# EAGLE board L1-Mainv1 (EAGLE 7.2.0)
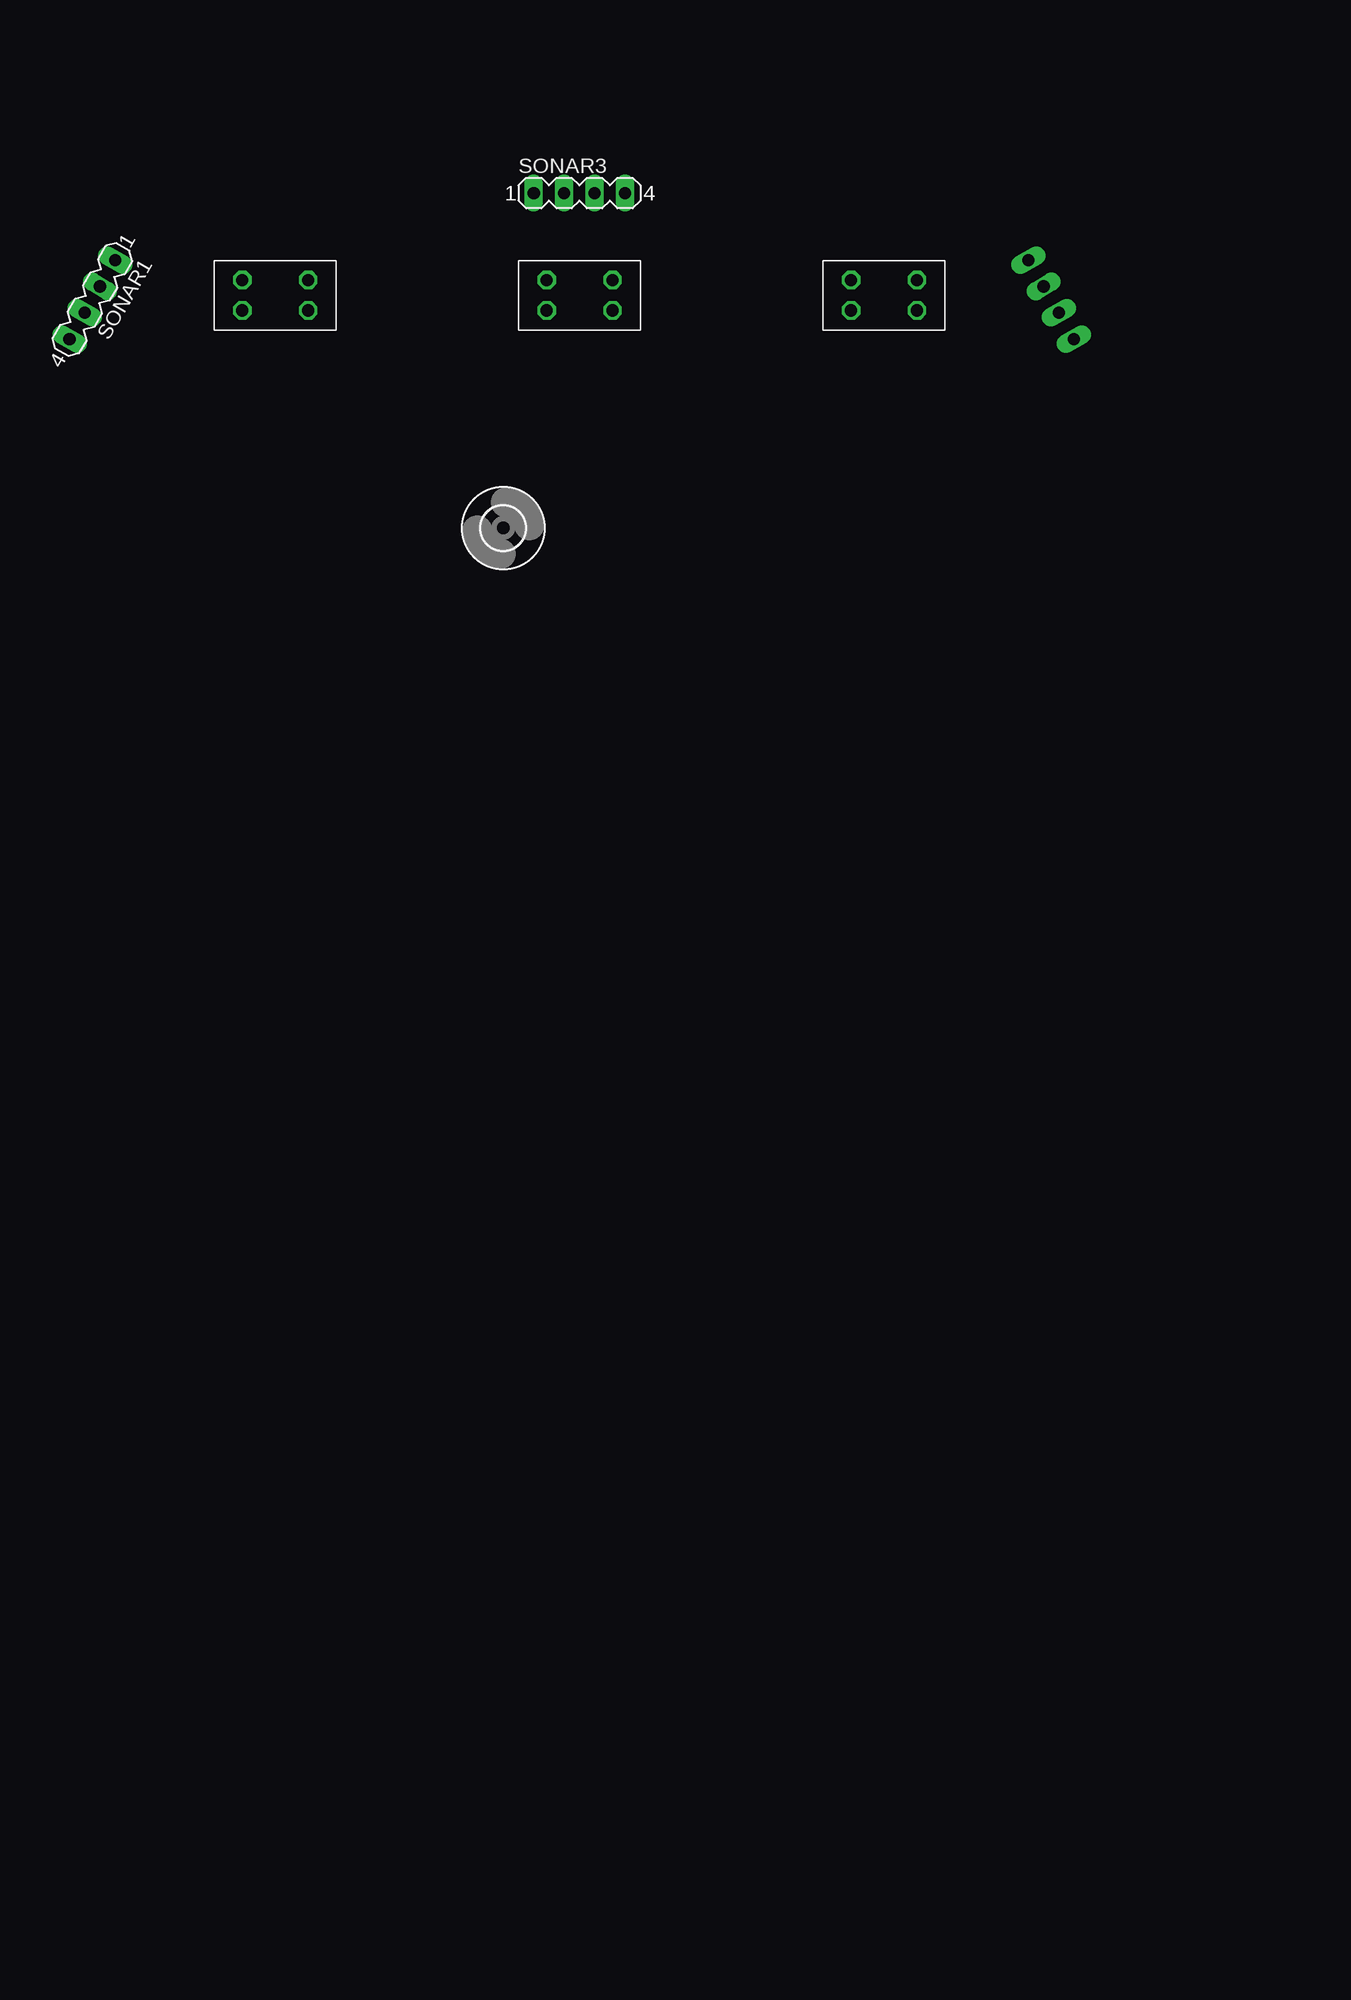
[diagram p0: board, top side]
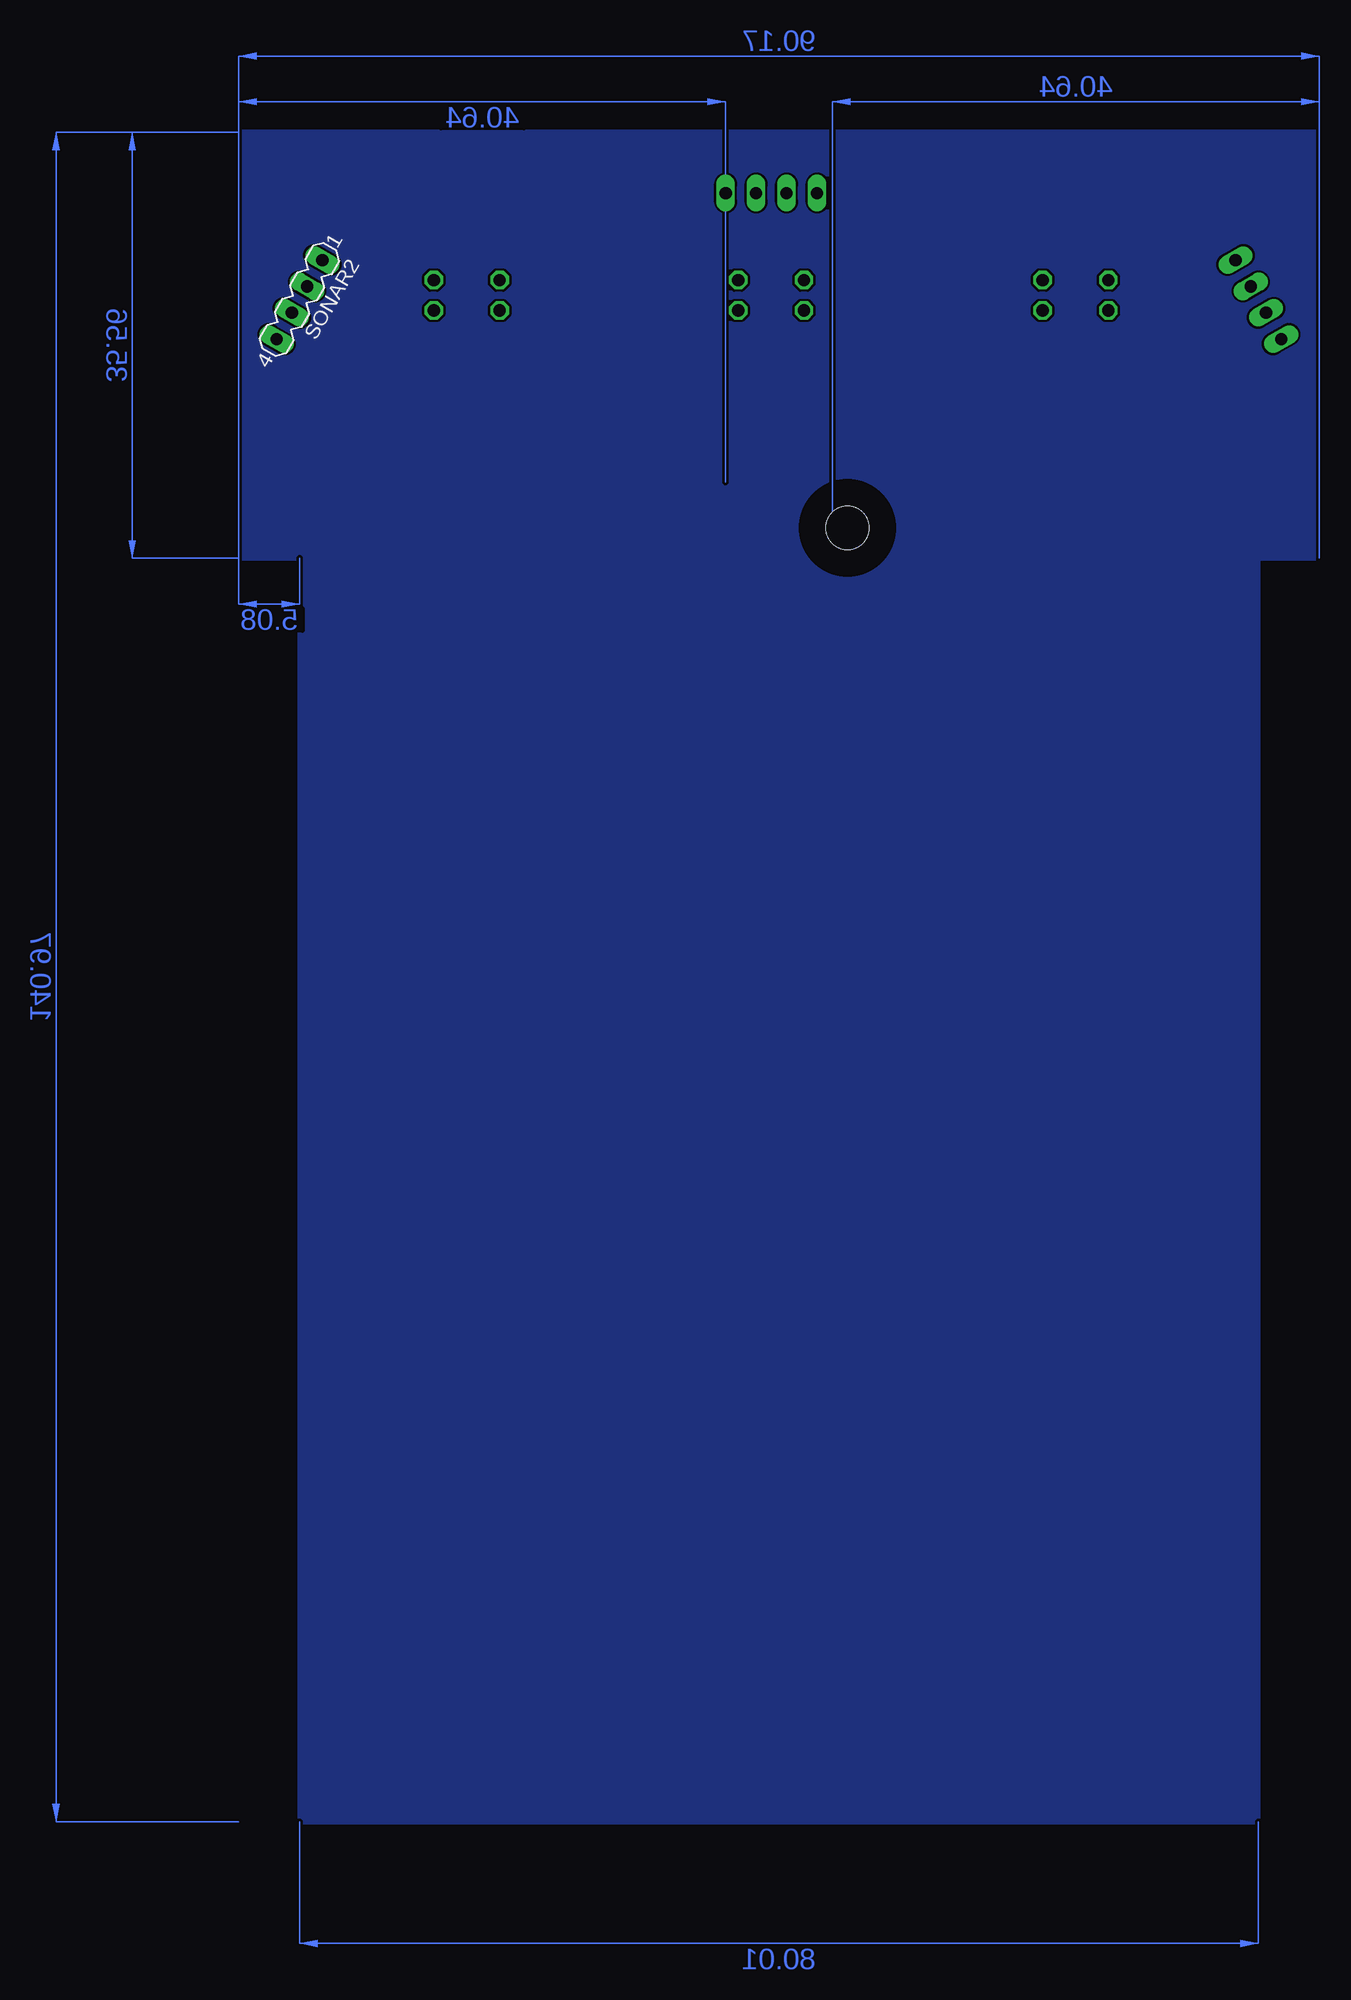
[diagram p1: board, bottom side, seen from below]

No outline drawn. Coordinates in mm, seen from the top.
Copper layers (1*16): Top 0.035mm / dielectric 1.5mm / Bottom 0.035mm
Design rules "default": minimum track width 10mil, minimum drill 24mil, track to track 8mil, track to pad 8mil, pad to pad 8mil, via to via 8mil, smd to smd 8mil, copper to edge 40mil, drill to drill 8mil, minimum pad ring 10mil, minimum via ring 8mil, stop-mask expansion 4mil, vias tented up to drill 0mil, thermal gap 10mil

## Footprints (pad centres in the part's own frame; a part is rotated, then mirrored left to right if it is on the bottom)
3,6 = hole 3.6: 0,0
TCRT = drill 1.016 octagon: 1 2.35,4.17; 2 7.85,4.17; 3 2.35,1.63; 4 7.85,1.63
MA04-1 = drill 1.016 long: 1 -3.81,0; 2 -1.27,0; 3 1.27,0; 4 3.81,0

## Placement (x,y rotation side)
E$1  [3,6]  88.9,118.11 0 top
E$3  [TCRT]  115.57,134.62 0 top
SONAR1  [MA04-1]  54.61,137.16 240 top
SONAR2  [MA04-1]  134.62,137.16 240 bottom
SONAR3  [MA04-1]  95.25,146.05 0 top
TCRT1  [TCRT]  64.77,134.62 0 top
TCRT2  [TCRT]  90.17,134.62 0 top

## Library data of the parts
E$1 = holes
E$3 TCRT1 TCRT2 = tcrt
SONAR1-SONAR3 = con-lstb

## Tracks (layer width: path | path; a pad name or v marks a point on that pad's centre or on a via)
S$2
  pour Bottom: 49.53,151.13 139.7,151.13 139.7,115.57 134.62,115.57 134.62,10.16 54.61,10.16 54.61,115.57 49.53,115.57
(copper drawn outside any net)
  shapes: Bottom area x7